# Altium PCB lab4.PcbDoc
Units mil, origin at the board's own origin, x right, y up, seen from the top; angles counter-clockwise.
Board outline 649.61 x 1033.46 mil, 2 copper layers (Top Layer, Top, Bottom Layer, Bottom); 28 components, 18 nets, 71 pads, 0 vias.
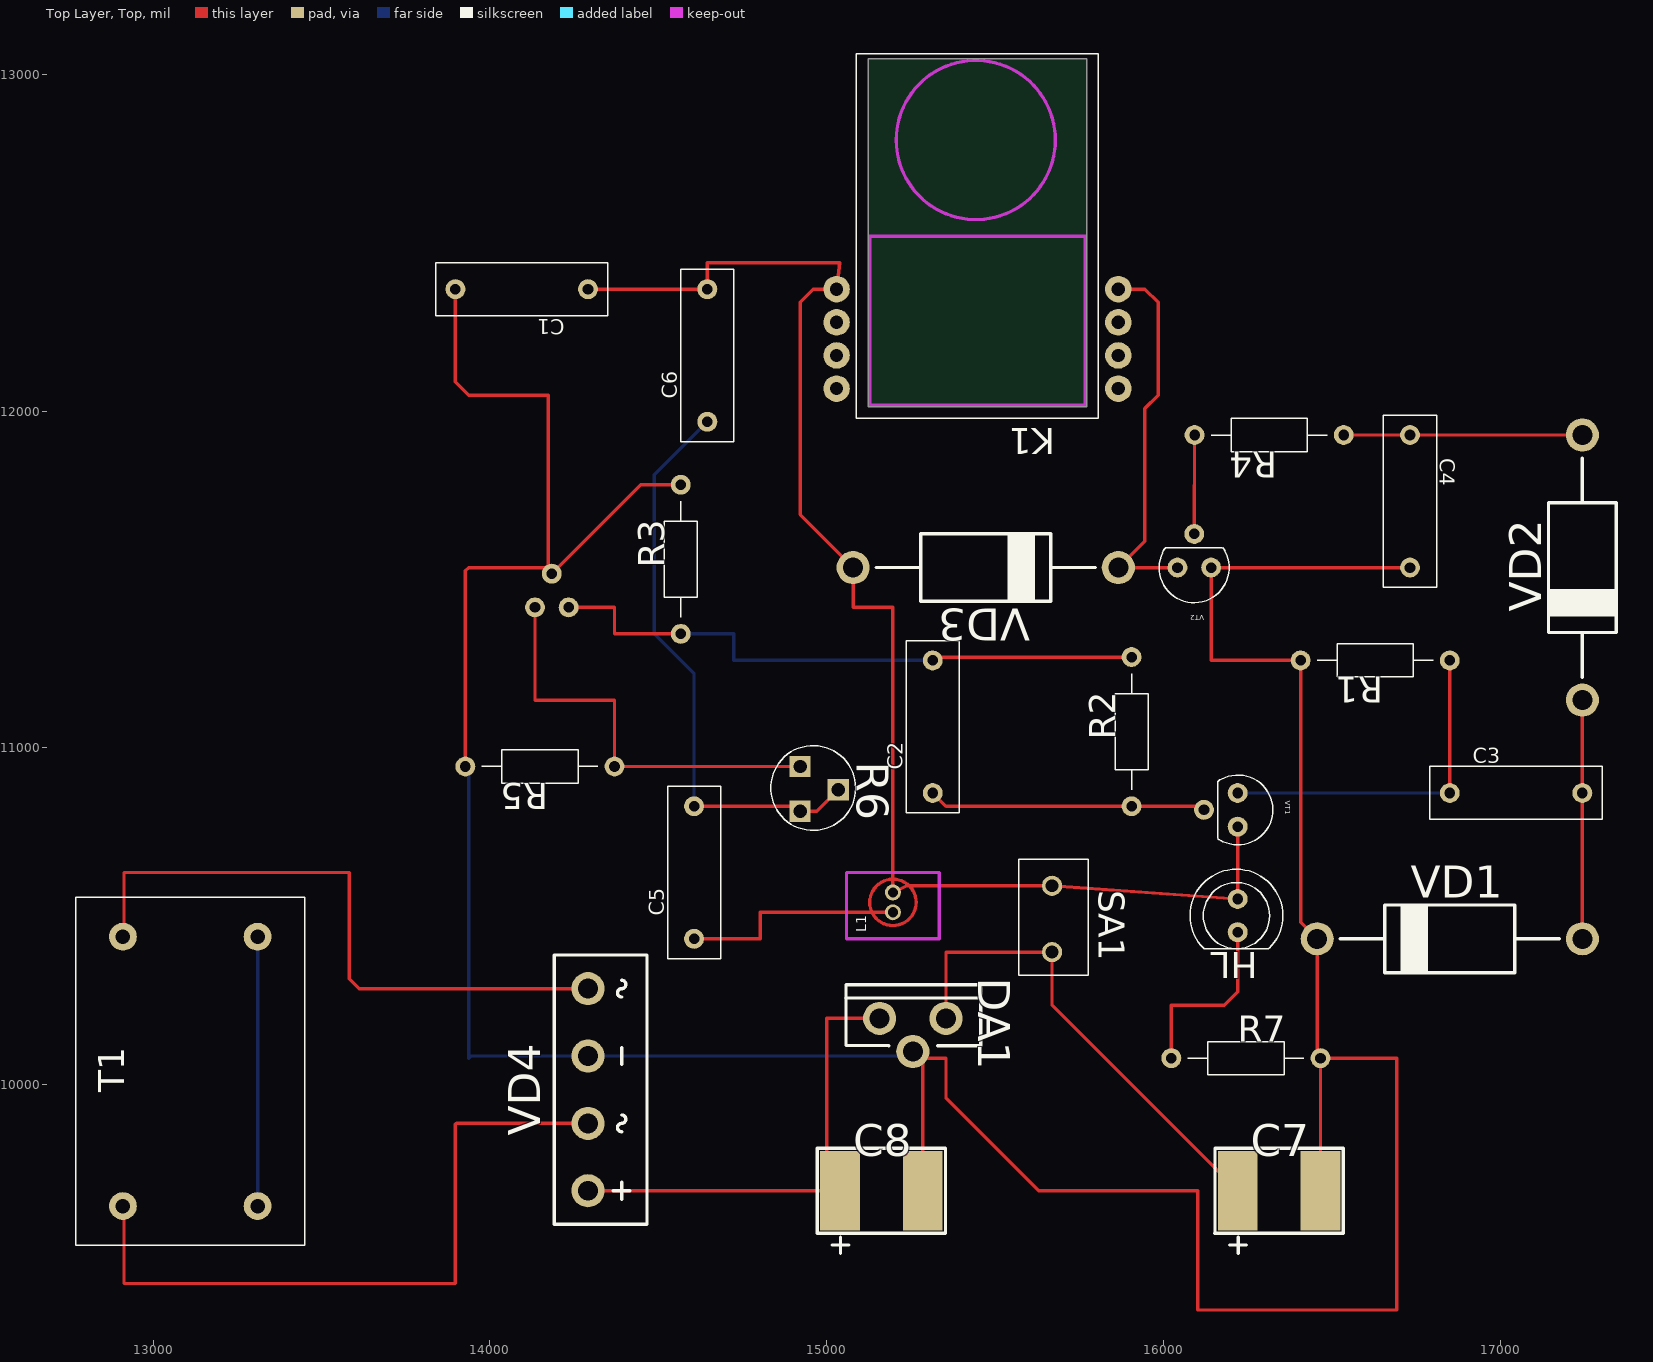
[diagram p0: Top Layer, Top view]
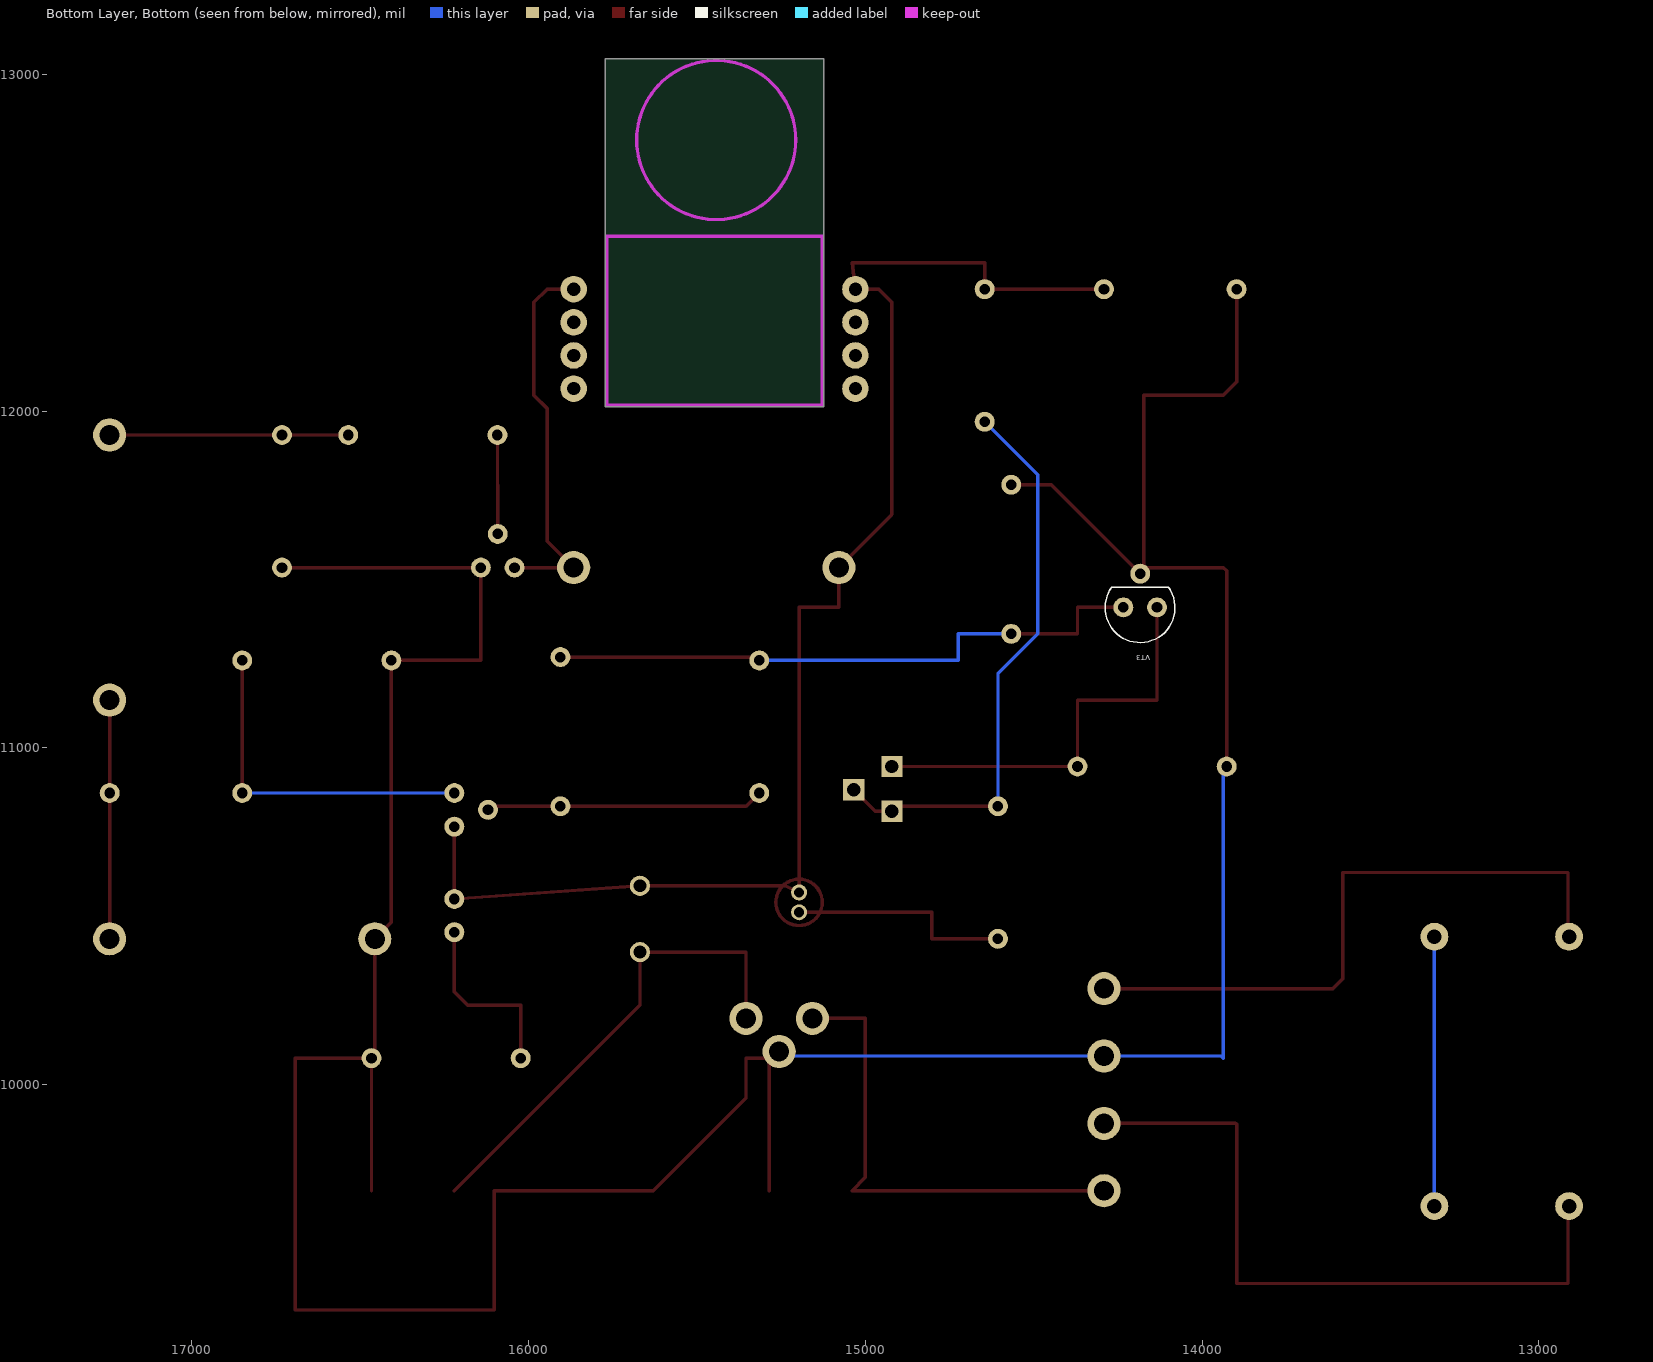
[diagram p1: Bottom Layer, Bottom view, seen from below]

## Layer stack, top to bottom
Top Solder, Top Mask: solder mask 0.4, Solder Resist, Dk 3.5
Top Layer, Top: signal copper 1.4
Dielectric 1: dielectric 12.6, FR-4, Dk 4.8
Bottom Layer, Bottom: signal copper 1.4
Bottom Solder, Bot Mask: solder mask 0.4, Solder Resist, Dk 3.5

## Board outline
15123.03,12012.8 15772.64,12012.8 15772.64,13046.26 15123.03,13046.26

## Design rules (kind name [scope] priority, off if disabled: settings)
Clearance [All] p1: gap=10 ignorepadtopadclearanceinfootprint=FALSE except(0: Arc-Hole Track-Hole SMDPad-Hole THPad-Hole Via-Hole Fill-Hole Poly-Hole Region-Hole Text-Hole; 11.81: Arc-Arc Arc-Track Arc-THPad Arc-Via Track-Track Track-THPad Track-Via THPad-THPad THPad-Via Via-Via)
PlaneClearance [All] p1: clearance=10
PolygonConnect [All] p1: connectstyle=Relief reliefconductorwidth=10 reliefentries=4 polygonreliefangle="90 Angle" airgapwidth=10
RoutingVias [All] p1: holewidth=28 width=50 viastyle="Through Hole" minholewidth=28 minwidth=50 maxholewidth=28 maxwidth=50
SolderMaskExpansion [All] p1: expansion=4 istentingtop=FALSE
Width [All] p1: maxlimit=10 minlimit=10 preferedwidth=10
29 further rules are at their usual default settings.

## Components (designator, comment, footprint, x,y, rotation, side; value= is the part's Value field where it differs from the comment)
C1 "" B32921(13X4) 14094.49,12362.2 r180 top
C2 "" B32921(13X4) 15314.96,11062.99 r90 top
C3 "" B32921(13X4) 17047.24,10866.14 r0 top
C4 "" B32921(13X4) 16732.28,11732.28 r270 top
C5 "" B32921(13X4) 14606.3,10629.92 r90 top
C6 "" B32921(13X4) 14645.67,12165.35 r90 top
C7 "" CC-PL-EL1 16220.47,9685.04 r0 top
C8 "" CC-PL-EL1 15039.37,9685.04 r0 top
DA1 "" KR142EN_Primary 15157.48,10196.85 r270 top
HL "{Value}" LED-5MM 16220.47,10551.18 r180 top
K1 "" РЭС6 15866.14,12165.35 r180 top
L1 "" L 15196.85,10511.81 r90 top
R1 "" C2-33H-0.125W 16850.39,11259.84 r180 top
R2 "" C2-33H-0.125W 15905.51,10826.77 r90 top
R3 "" C2-33H-0.125W 14566.93,11338.58 r90 top
R4 "" C2-33H-0.125W 16535.43,11929.13 r180 top
R5 "" C2-33H-0.125W 14370.08,10944.88 r180 top
R6 "" SP3-19A1 14921.26,10944.88 r270 top
R7 "" C2-33H-0.125W 16023.62,10078.74 r0 top
SA1 "" 8AS9M2RE 15669.29,10590.55 r270 top
T1 "" ТПП 13110.24,10039.37 r90 top
VD1 "" DO27 16456.69,10433.07 r0 top
VD2 "" DO27 17244.09,11141.73 r90 top
VD3 "" DO27 15866.14,11535.43 r180 top
VD4 "" KBU6A 14291.34,9685.04 r90 top
VT1 "" TO-92-1 16220.47,10866.14 r270 top
VT2 "" TO-92-1 16141.73,11535.43 r180 top
VT3 "" TO-92-1 14133.86,11417.32 r0 bottom

## Footprints (in the part's own frame and the unit in brackets; to place one, negate y for a bottom-side part, rotate by r counter-clockwise, add the part's x,y. Pads: shape width x height; smd on the part's side, far side on the other; paste and mask are expansions set on the pad)
8AS9M2RE [mil]
  round 60 hole 38: 1(0,0) 2(196.85,0)
  silkscreen extent -79,-98 266,108
B32921(13X4) [mm]
  round 1.5 hole 0.8: 1(-5,0) 2(5,0)
  silkscreen extent -6.5,-2 6.5,2
C2-33H-0.125W [mm]
  round 1.5 hole 0.8: 1(0,0) 2(11.25,0)
  silkscreen extent 1.25,-1.25 10,1.25
CC-PL-EL1 [mm]
  rect 3x6 smd: 1(0,0) 2(6.25,0)
  silkscreen extent -1.72,-4.7 7.97,3.2
DO27 [mm]
  round 2.5 hole 1.5: 1(20,0) 2(0,0)
  silkscreen extent 1.74,-2.55 18.27,2.55
KBU6A [mm]
  round 2.5 hole 1.5: 1(0,0) 2(5.08,0) 3(10.16,0) 4(15.24,0)
  silkscreen extent -2.54,-4.44 17.78,2.54
KR142EN_Primary [mm]
  round 2.5 hole 1.5: 1(0,0) 2(2.5,2.5) 3(0,5)
  silkscreen extent -2.54,-2.56 2.06,7.62
L [mm]
  round 1.2 hole 0.765: 1(0,0) 2(1.5,0)
  Top Layer, Top lines w0.254: -1,0 cw(c0.75,0) 2.5,0 cw(c0.75,0) -1,0
  Top Layer, Top keep-out lines w0.254: -2,3.5 -2,-3.5 3,-3.5 3,3.5 -2,3.5
LED-5MM [mm]
  round 1.5 hole 0.8: 1(0,0) 2(0,2.5)
  silkscreen extent -3.41,-2.25 3.59,3.75
SP3-19A1 [mm]
  rect 1.6x1.6 hole 1: 1(0,0) 2(1.75,2.875) 3(3.375,0)
  silkscreen extent -1.57,-2.21 4.83,4.19
TO-92-1 [mm]
  round 1.5 hole 0.8: 1(0,0) 2(1.27,-2.54) 3(2.54,0)
  silkscreen extent -1.35,-1.5 3.92,2.65
РЭС6 [mm]
  round 2 hole 1: 1(0,0) 2(0,-2.5) 3(0,2.5) 4(21.25,0) 5(21.25,-2.5) 6(21.25,2.5) 7(0,-5) 8(21.25,-5)
  Keep-Out Layer, Board lines w0.25: 18.75,3.75 2.5,3.75 2.5,-9 18.75,-9 18.75,3.75 ; 16.75,-16.25 ccw(c10.75,-16.25) 4.75,-16.25 ccw(c10.75,-16.25) 16.75,-16.25
  silkscreen extent 1.5,-22.75 19.75,4.75
ТПП [mm]
  round 2.1 hole 1.1: 3(-10.16,-5.08) 9(10.16,-5.08) 11(-10.16,5.08) 14(10.16,5.08)
  silkscreen extent -13.13,-8.63 13.13,8.63

## Nets (pads, with @x,y where several pads share a name; then routed paths per layer and width w, separated by ;. In a path a pad name is that pad's centre, name@x,y a point inside that pad or via, vN(x,y) a via of type N, cw(c..) or ccw(c..) an arc to the next point about the centre after c; other vN are vias at no path point)
+220B: T1.3 T1.9 | length 800
  Bottom Layer, Bottom w10: T1.3 T1.9
GND: C1.2 C4.2 C7.2 C8.2 DA1.2 R1.2 R3.2 R5.2 R7.2 VD1.2 VD4.3 VT2.1 VT3.2 | length 10803.5
  Top Layer, Top w10: C1.2 13897.64,12086.61 13937.01,12047.24 14173.23,12047.24 14173.23,11527.95 VT3.2 ; R5.2 13927.17,11525.59 13937.01,11535.43 14165.75,11535.43 VT3.2 ; R3.2 14448.03,11781.5 VT3.2 ; C8.2 15285.43,10068.9 DA1.2 15275.59,10078.74 15354.33,10078.74 15354.33,9960.63 15629.92,9685.04 16102.36,9685.04 16102.36,9330.71 16692.91,9330.71 16692.91,10078.74 R7.2 ; C7.2 R7.2 ; C4.2 VT2.1 16141.73,11259.84 R1.2 16407.48,10482.28 VD1.2 16456.69,10088.58 R7.2
  Bottom Layer, Bottom w10: R5.2 13937.01,10935.04 13937.01,10078.74 13943.31,10085.04 VD4.3 15242.52,10085.04 DA1.2
NET00000: C5.1 L1.1 | length 669.3
  Top Layer, Top w10: C5.1 14803.15,10433.07 14803.15,10511.81 L1.1
NET00001: C1.1 C6.2 HL.1 K1.8 L1.2 SA1.1 VD3.1 VT1.3 | length 4210.6
  Top Layer, Top w10: C1.1 C6.2 14645.67,12440.94 15039.37,12440.94 K1.8 14960.63,12362.2 14921.26,12322.83 14921.26,11692.91 VD3.1 15078.74,11417.32 15196.85,11417.32 L1.2 15236.22,10590.55 SA1.1 HL.1 VT1.3
NET00002: HL.2 R7.1 | length 547.8
  Top Layer, Top w10: R7.1 16023.62,10236.22 16181.1,10236.22 16220.47,10275.59 HL.2
NET00003: C7.1 DA1.3 SA1.2 | length 1448.8
  Top Layer, Top w10: DA1.3 15354.33,10393.7 SA1.2 15669.29,10236.22 C7.1
NET00004: C8.1 DA1.1 VD4.1 | length 1433.6
  Top Layer, Top w10: VD4.1 C8.1 15000,9724.41 15000,10196.85 DA1.1
NET00005: T1.11 VD4.2 | length 2082.9
  Top Layer, Top w10: T1.11 12913.39,9636.22 12913.39,9409.45 13897.64,9409.45 13897.64,9881.89 13900.79,9885.04 VD4.2
NET00007: T1.14 VD4.4 | length 1897.2
  Top Layer, Top w10: T1.14 12913.39,10442.52 12913.39,10629.92 13582.68,10629.92 13582.68,10314.96 13612.6,10285.04 VD4.4
NET00012: C3.1 R1.1 VT1.1 | length 1023.6
  Top Layer, Top w10: C3.1 R1.1
  Bottom Layer, Bottom w10: VT1.1 C3.1
NET00013: C2.1 R2.1 VT1.2 | length 826.2
  Top Layer, Top w10: C2.1 15354.33,10826.77 R2.1 16102.36,10826.77 16112.99,10816.14 VT1.2
NET00014: C2.2 R2.2 R3.1 VT3.3 | length 1833.2
  Top Layer, Top w10: VT3.3 14370.08,11417.32 14370.08,11338.58 R3.1 ; C2.2 15324.8,11269.68 R2.2
  Bottom Layer, Bottom w10: R3.1 14724.41,11338.58 14724.41,11259.84 C2.2
NET00015: C3.2 VD1.1 VD2.2 | length 708.7
  Top Layer, Top w10: VD1.1 C3.2 VD2.2
NET00016: C4.1 R4.1 VD2.1 | length 708.7
  Top Layer, Top w10: R4.1 C4.1 VD2.1
NET00017: R4.2 VT2.2 | length 293.7
  Top Layer, Top w10: VT2.2 R4.2
NET00018: K1.7 VD3.2 VT2.3 | length 1146.3
  Top Layer, Top w10: K1.7 15944.88,12362.2 15984.25,12322.83 15984.25,12047.24 15944.88,12007.87 15944.88,11614.17 VD3.2 VT2.3
NET00020: R5.1 R6.1 VT3.1 | length 1259.8
  Top Layer, Top w10: VT3.1 14133.86,11141.73 14370.08,11141.73 R5.1 R6.1
NET00021: C5.2 C6.1 R6.2 R6.3 | length 1716.7
  Top Layer, Top w10: C5.2 14906.5,10826.77 R6.3 14970.47,10812.01 R6.2
  Bottom Layer, Bottom w10: C5.2 14606.3,11220.47 14488.19,11338.58 14488.19,11811.02 C6.1
pads on no net: K1.1 K1.2 K1.3 K1.4 K1.5 K1.6

## Text inside footprints (layer, text, board x,y; h text height)
DA1: Mechanical 1, Top Assy "1" at 15057.48,10112.63 h125
HL: Mechanical 1, Top Assy "A" at 16181.1,10566.93 h24.61 r180
VT1: Mechanical 1, Top Assy "C" at 16251.57,10775.98 h12.3 r270; Mechanical 1, Top Assy "E" at 16251.57,10894.09 h12.3 r270; Mechanical 1, Top Assy "BASE" at 16171.26,10836.61 h12.3 r270
VT2: Mechanical 1, Top Assy "C" at 16051.57,11504.33 h12.3 r180; Mechanical 1, Top Assy "E" at 16169.68,11504.33 h12.3 r180; Mechanical 1, Top Assy "BASE" at 16112.21,11584.64 h12.3 r180
VT3: Mechanical 2, Bot Assy "C" at 14224.02,11386.22 h12.3 r180; Mechanical 2, Bot Assy "E" at 14105.91,11386.22 h12.3 r180; Mechanical 2, Bot Assy "BASE" at 14163.38,11466.53 h12.3 r180